# Altium PCB 2015_ALIM_HITEC.PcbDoc
Units mil, origin at the board's own origin, x right, y up, seen from the top; angles counter-clockwise.
Board outline 2440.94 x 1093 mil, 4 copper layers (1-TOP, 2-SIGNAL, 3-GND, 4-BOT), stack 68 mil thick; 13 components, 4 nets, 26 pads, 45 vias.
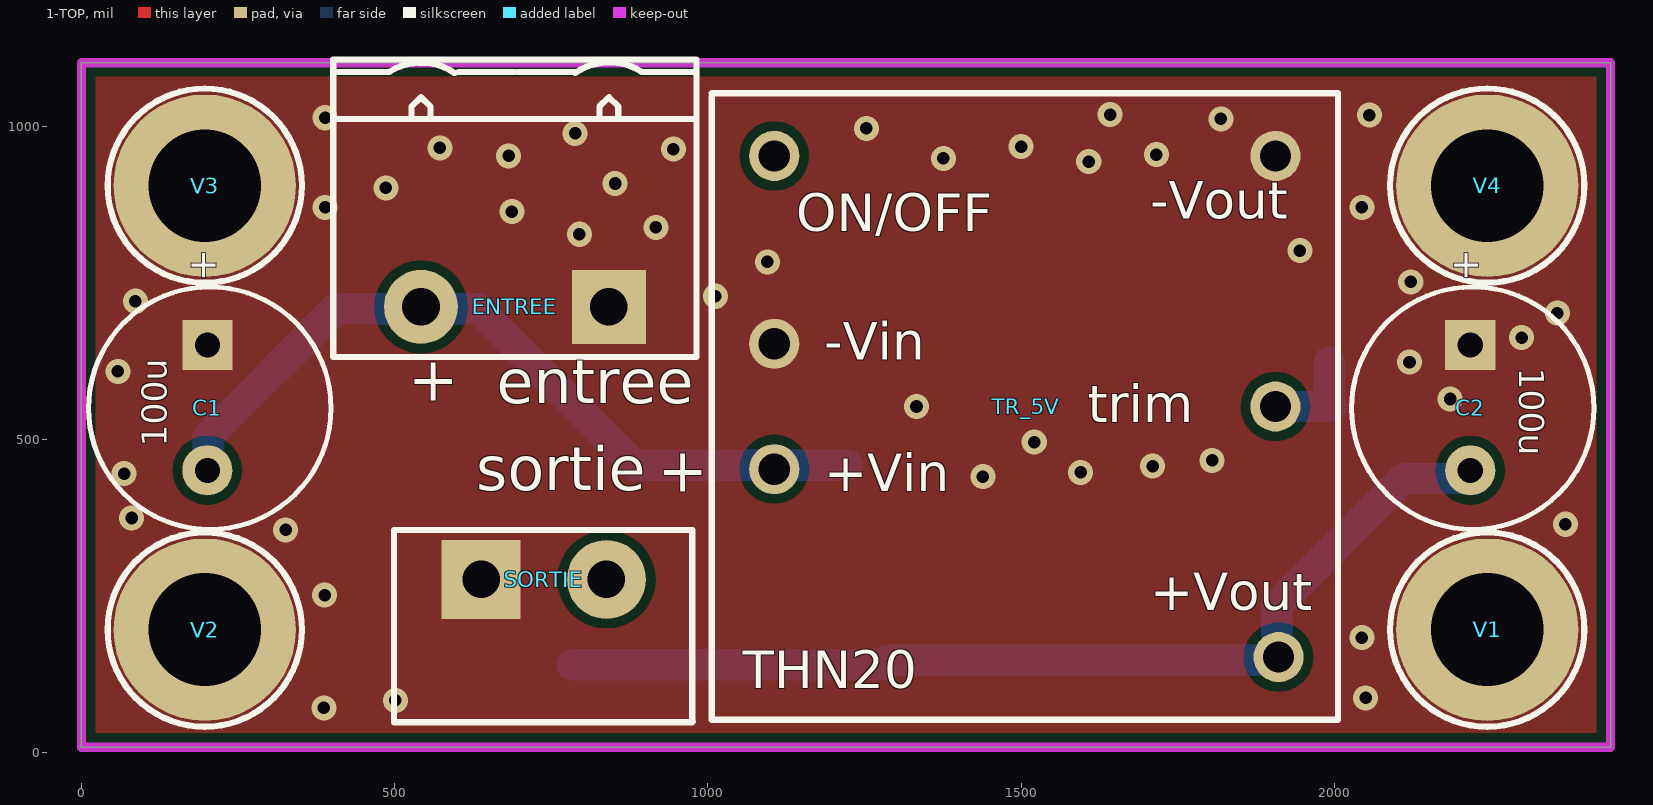
[diagram p0: 1-TOP view]
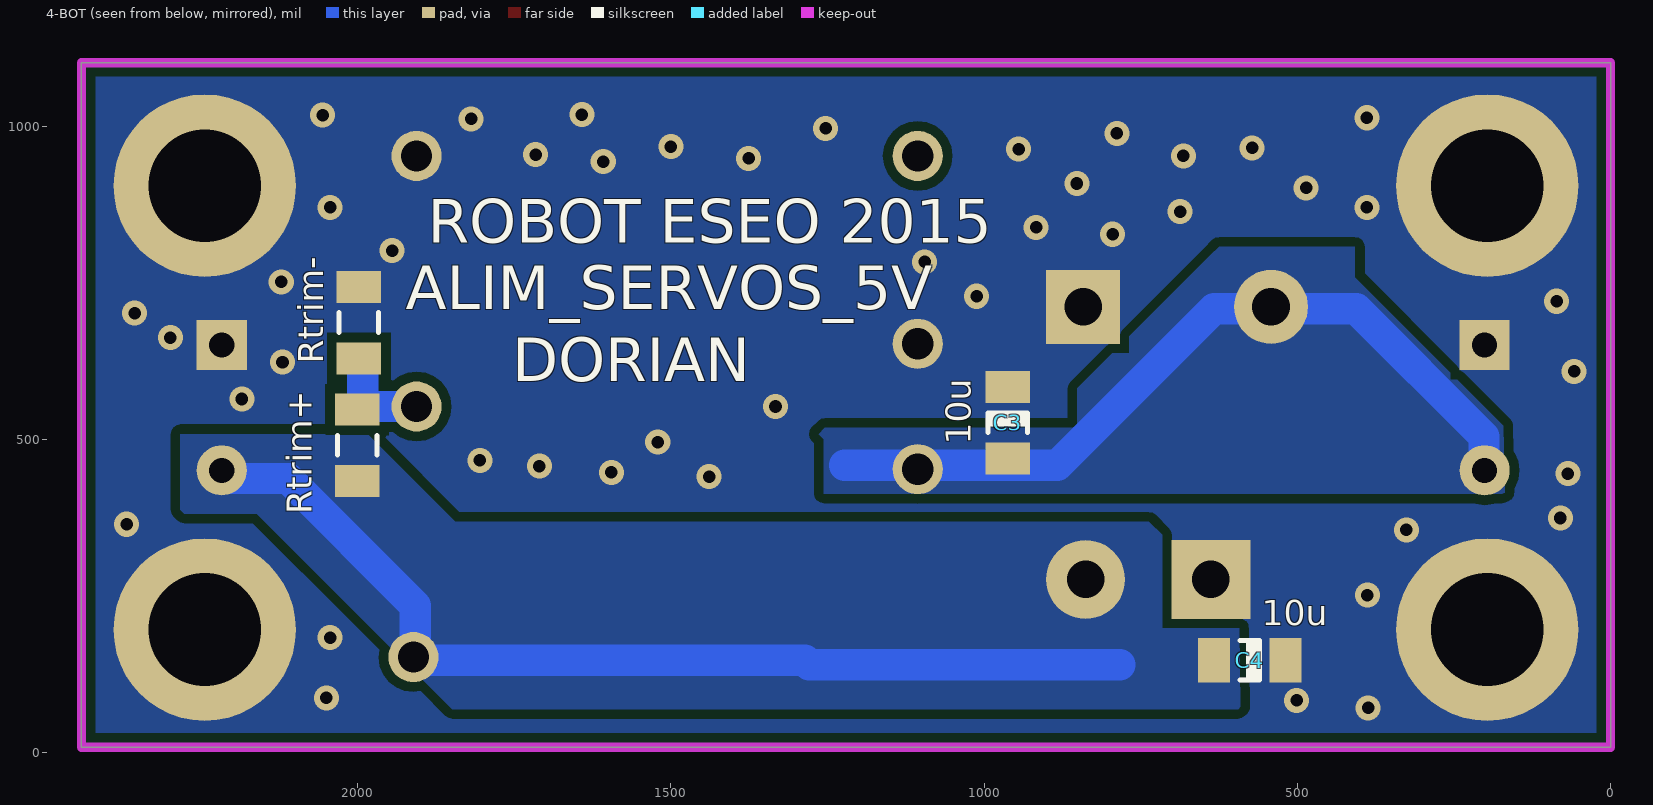
[diagram p1: 4-BOT view, seen from below]
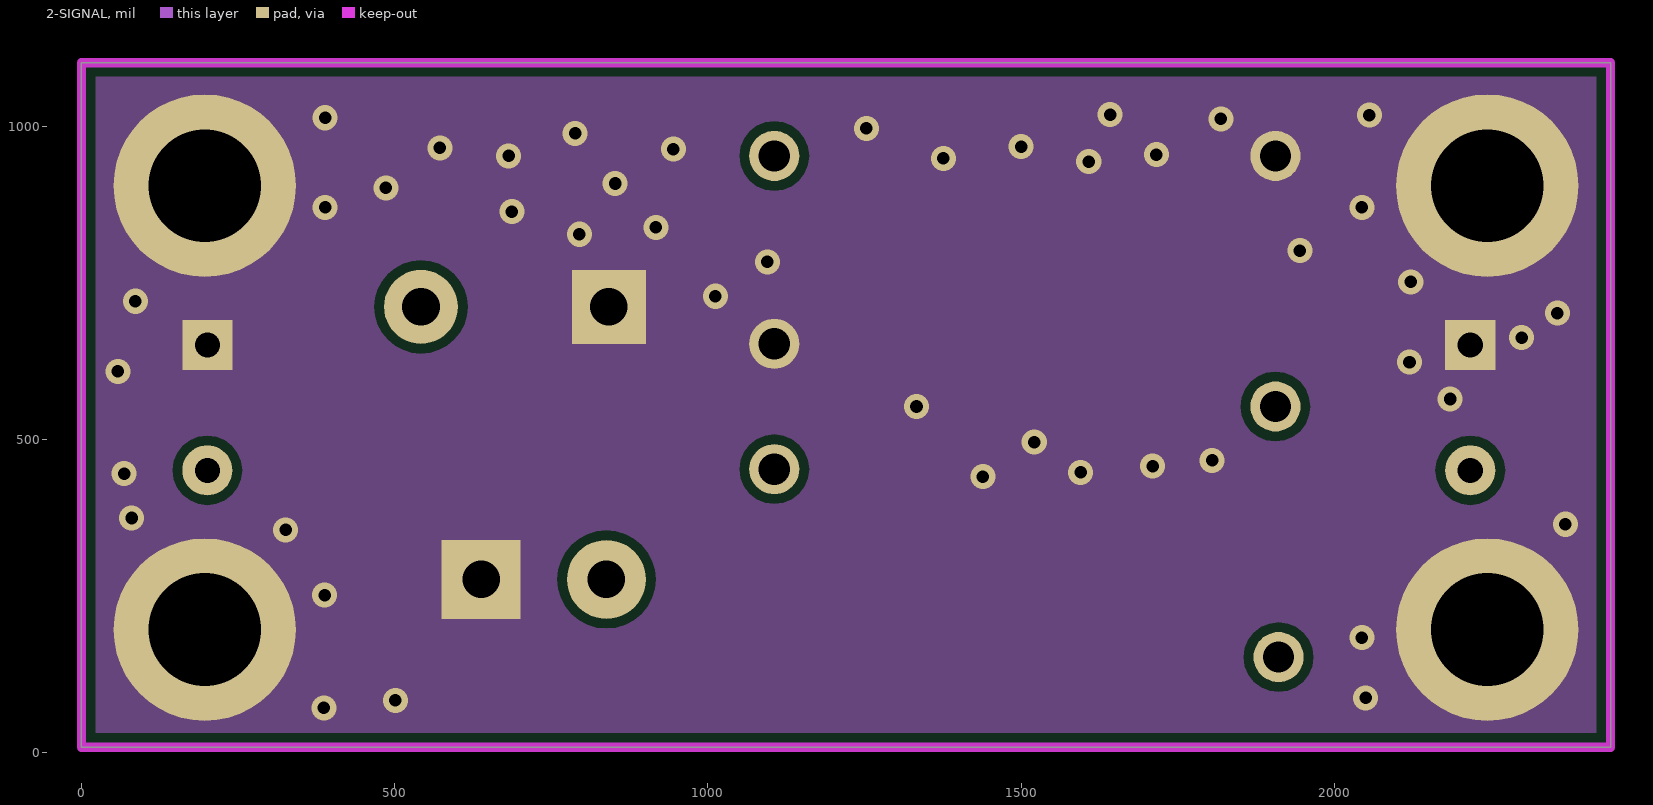
[diagram p2: 2-SIGNAL]
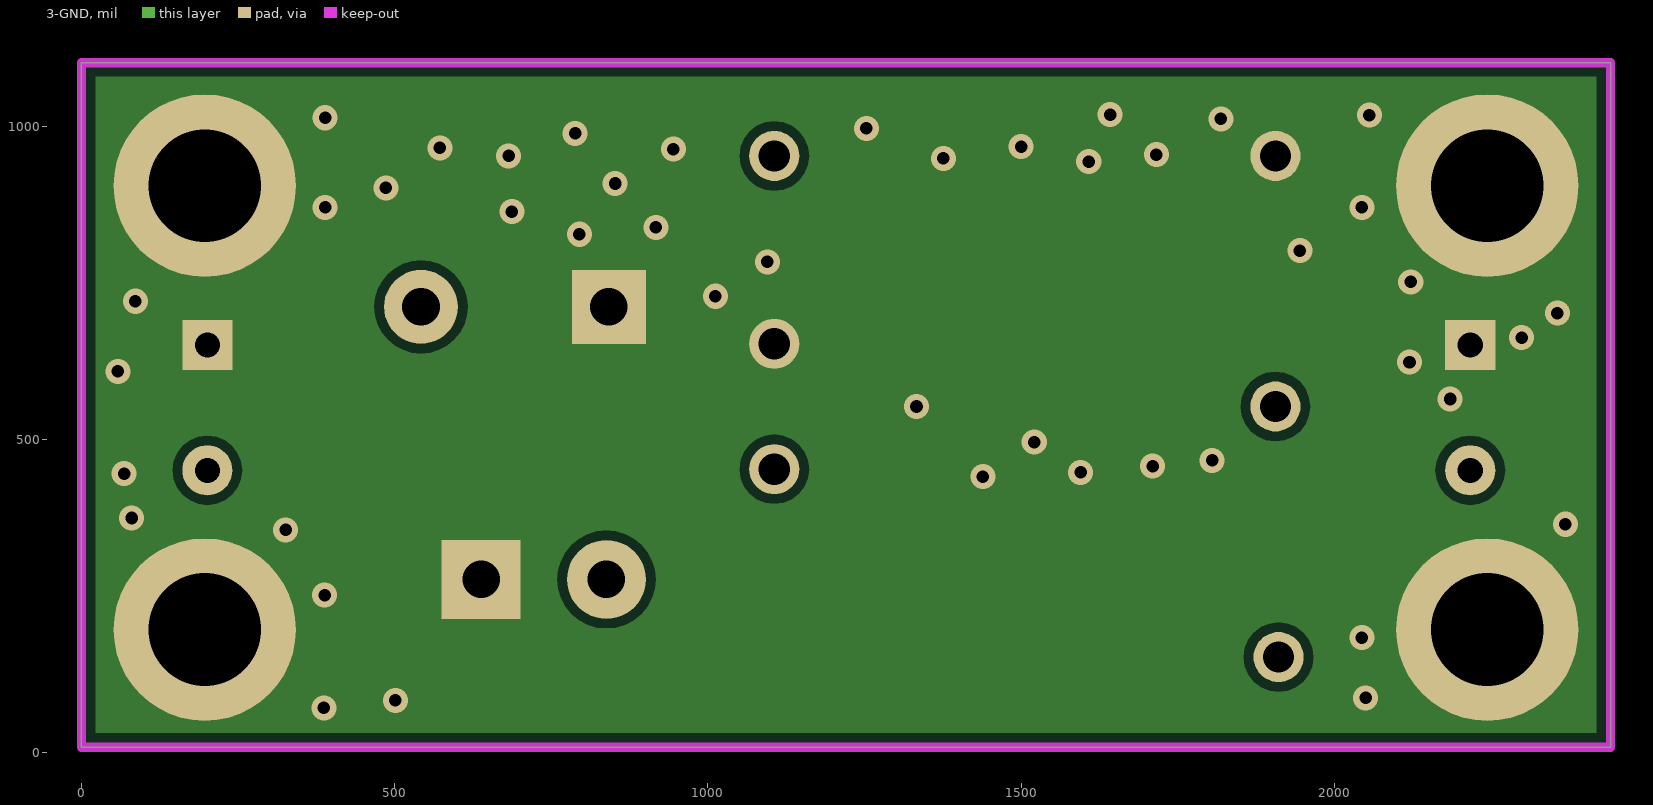
[diagram p3: 3-GND]
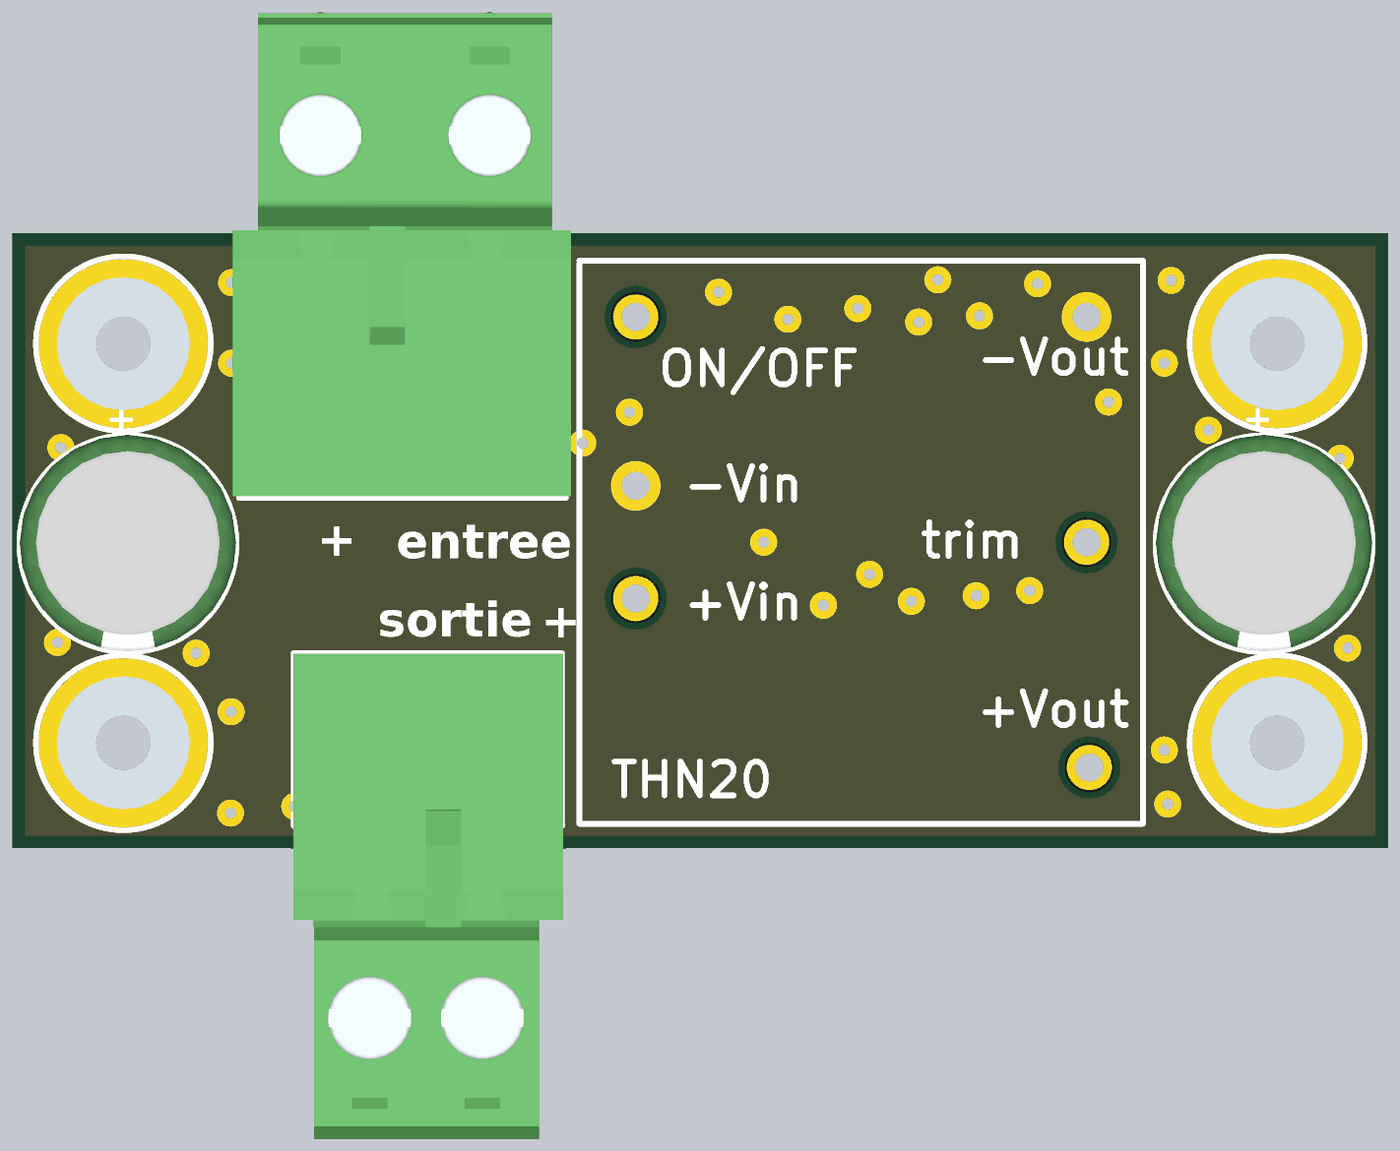
[diagram p4: 3D render of the assembled board from above, using the file's embedded part models]
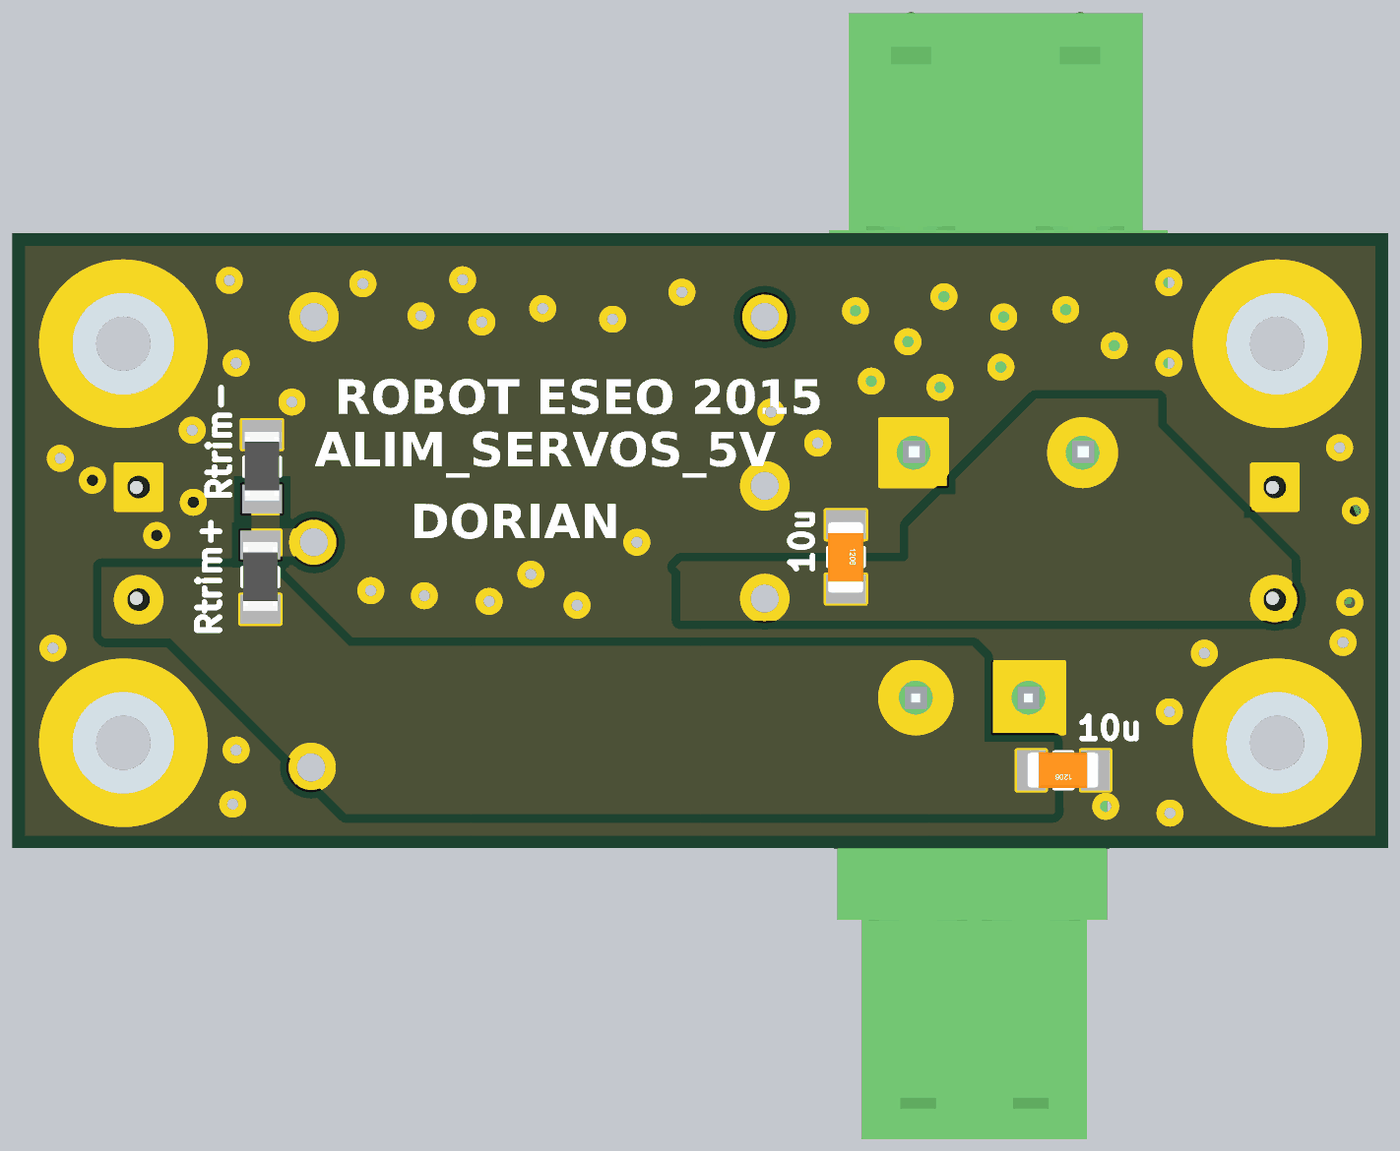
[diagram p5: 3D render of the assembled board from below, using the file's embedded part models]

## Layer stack, top to bottom
Top Solder: solder mask 0.4, Solder Resist, Dk 3.5
1-TOP: signal copper 1.4
Dielectric1: core 20.8, FR-4, Dk 4.8
2-SIGNAL: signal copper 1.4
Dielectric2: prepreg 20.8, FR-4, Dk 4.8
3-GND: signal copper 1.4
Dielectric3: core 20.8, FR-4, Dk 4.8
4-BOT: signal copper 1.4
Bottom Solder: solder mask 0.4, Solder Resist, Dk 3.5

## Board outline
0,9 2440.94,9 2440.94,1102 0,1102

## Design rules (kind name [scope] priority, off if disabled: settings)
Clearance Clearance_4 [InNamedPolygon('GND_TOP') Or  InNamedPolygon('3-GND') Or  InNamedPolygon('2-GND') Or  InNamedPolygon('4-GND')] p1: gap=15
Clearance Clearance_3 [InNamedPolygon('4-GND') Or  InNamedPolygon('GND_TOP') Or  InNamedPolygon('2-GND') Or  InNamedPolygon('3-GND')] p2: gap=10
Clearance Clearance_2 [InNamedPolygon('4-GND') Or  InNamedPolygon('2-GND') Or  InNamedPolygon('3-GND') Or  InNamedPolygon('1-GND') Or  InNamedPolygon('2-GND24')] p3: gap=10
Clearance Clearance_1 [InNamedPolygon('2-GND') Or  InNamedPolygon('3-GND') Or  InNamedPolygon('1-GND') Or  InNamedPolygon('4-GND')] p4: gap=10
Clearance [All] p5: gap=15
FabricationTestpoint [(IsPad And (OnTopLayer Or OnBottomLayer))] p1: side=3 testpointundercomponent=TRUE minsize=40 maxsize=100 preferedsize=60 minholesize=0 maxholesize=40 preferedholesize=32 testpointgrid=1 allowsidetop=TRUE allowsidebottom=TRUE usegrid=TRUE gridtolerance=0.01
HoleSize [All] p1: absolutevalues=TRUE maxlimit=200 minlimit=1 maxpercent=80.000 minpercent=20.000
PlaneConnect [All] p1: planeconnectstyle=Direct reliefexpansion=20 reliefentries=4 reliefconductorwidth=10 reliefairgap=10
PolygonConnect [All] p1: connectstyle=Direct reliefconductorwidth=10 reliefentries=4 polygonreliefangle="90 Angle" airgapwidth=10
RoomDefinition 2015_ALIM_HITEC [InComponentClass('2015_ALIM_HITEC')] p1: confinementstyle=ConfineIn formatcopy=TRUE lockcomponents=FALSE outline 2565,55 6247,55 6247,663 2565,663
RoutingVias [All] p1: holewidth=28 width=50 viastyle="Through Hole" minholewidth=28 minwidth=50 maxholewidth=28 maxwidth=50
SilkToSolderMaskClearance SilkscreenOverComponentPads [IsPad] p1: minsilkscreentomaskgap=10 clearancetoexposedcopper=TRUE
SolderMaskExpansion [All] p1: expansion=4
Width [All] p1: maxlimit=300 minlimit=10 preferedwidth=20
25 further rules are at their usual default settings.

## Components (designator, comment, footprint, x,y, rotation, side; value= is the part's Value field where it differs from the comment)
C1 "100uF" CONDENSATEUR_POLARISE_ELECTROLYTIQUE_RADIAL_5.08/8.9 201,651 r270 top
C2 "100uF" CONDENSATEUR_POLARISE_ELECTROLYTIQUE_RADIAL_5.08/8.9 2217,651 r270 top
C3 "10uF" C1206_N 962,527 r270 bottom
C4 "10uF" C1206_N 576,148 r0 bottom
ENTREE "BORNIER2" BORNIER2_FEM_COUDE 842,712 r180 top
Rtrim+ "-" R1206_N 2001,491 r90 bottom
Rtrim- "-" R1206_N 1998,687 r90 bottom
SORTIE "Bornier 2-Pin" BORNIER2_HORIZ 838,277 r180 top
TR_5V "TRACO THN 20-4811Wi" TRACO_THN20 1006,1053 r0 top
V1 "Entretoise WURTH CMS" ENTRETOISE_CMS 2244.09,196.85 r0 top
V2 "Entretoise WURTH CMS" ENTRETOISE_CMS 196.85,196.85 r0 top
V3 "Entretoise WURTH CMS" ENTRETOISE_CMS 196.85,905.51 r0 top
V4 "Entretoise WURTH CMS" ENTRETOISE_CMS 2244.09,905.51 r0 top

## Footprints (in the part's own frame and the unit in brackets; to place one, negate y for a bottom-side part, rotate by r counter-clockwise, add the part's x,y. Pads: shape width x height; smd on the part's side, far side on the other; paste and mask are expansions set on the pad)
BORNIER2_FEM_COUDE [mm] "Connector; Header; 2 Position; Right Angle; Female; Pin Spacing=5.08mm Green"
  rect 3x3 hole 1.524: 1(0,0)
  round 3 hole 1.524: 2(7.62,0)
  silkscreen extent -3.56,-10.03 11.18,2.03, body extent -3.78,-19.88 11.46,1.96, height 15.2
BORNIER2_HORIZ [mm] "Connector; Header; 2 Position; screw terminal blocks, Pin Spacing=5.08mm"
  rect 3.2x3.2 hole 1.524: 1(5.08,0)
  round 3.2 hole 1.524: 2(0,0)
  silkscreen extent -3.51,-2.01 8.61,5.79, body extent -3.54,-1.99 8.62,19.95, height 15.15
C1206_N [mm] "Chip Capacitor, Body 3.2x1.6mm, IPC Medium Density"
  rect 1.3x1.8 smd: 1(-1.45,0) 2(1.45,0)
  silkscreen extent -0.4,-0.8 0.4,0.8, body extent -1.57,-0.81 1.63,0.79, height 1.02
CONDENSATEUR_POLARISE_ELECTROLYTIQUE_RADIAL_5.08/8.9 [mil] "CONDENSATEUR_POLARISE_ELECTROLYTIQUE_RADIAL ; DIAMETRE : 8.9mm ; ESPACEMENT BROCHES : 5.08mm"
  rect 80x80 hole 40: 1(0,0)
  round 80 hole 40: 2(200,0)
  silkscreen extent -93,-190 294,197, body extent -93,-188 291,196, height 485
ENTRETOISE_CMS [mm] "Entretoise CMS Wurth trou 4.4mm"
  round 7.4 hole 4.572: 1(0,0)
  silkscreen extent -3.94,-3.94 3.94,3.94, body extent -2.99,-3 2.99,2.98, height 3
R1206_N [mm] "Chip Resistor, Body 3.2x1.6mm, IPC Medium Density"
  rect 1.3x1.8 smd: 1(-1.45,0) 2(1.45,0)
  silkscreen extent -0.4,-0.8 0.4,0.8, body extent -1.68,-0.87 1.68,0.87, height 0.71
TRACO_THN20 [mil] "THN20"
  round 80 hole 50: 1(100,-600) 2(100,-400) 3(905,-900) 4(900,-500) 5(900,-100) 6(100,-100)
  silkscreen extent 0,-1000 1000,0, body extent -2,-1001 1001,0, height 390

## Part data
C1 C2: library part "Condensateur Polarise Traversant", "Polarized Capacitor"
C3 C4: library part Capacitor, "Capacitor"
ENTREE: "Terminal blocks, 2 pins, pitch=5mm"
Rtrim+ Rtrim-: library part Resistor, "Resistor"
TR_5V: "Traco 20W 24V to 5V*4A"
V1 V2 V3 V4: "Entretoise Wurth"

## Via types
v1: diameter 40, hole 20, 1-TOP to 4-BOT, 45 vias

## Nets (pads, with @x,y where several pads share a name; then routed paths per layer and width w, separated by ;. In a path a pad name is that pad's centre, name@x,y a point inside that pad or via, vN(x,y) a via of type N, cw(c..) or ccw(c..) an arc to the next point about the centre after c; other vN are vias at no path point)
5V: C2.2 C4.2 Rtrim+.1 SORTIE.2 TR_5V.3 | length 1604
  4-BOT w50: 783,141 1279,141 1286,148 1908,148 1908,235 2111,438 C2.2@2213,438
24V: C1.2 C3.2 ENTREE.2 TR_5V.1 | length 1256.1
  4-BOT w50: C1.2@202,458 202,505 406,709 633,709 883,459 1223,459
GND: C1.1 C2.1 C3.1 C4.1 ENTREE.1 Rtrim-.2 SORTIE.1 TR_5V.2 TR_5V.5 V1.1 V2.1 V3.1 V4.1
  other v1: 387,72 501,84 2050,88 2044,184 388,252 326,356 2369,365 80,375 1439,441 68,446 1595,448 1710,458 1805,467 1521,496 1333,553 2185,565 58,609 2120,624 2299,663 2356,702 86,721 1012,729 2122,752 1095,784 1945,802 795,828 917,839 687,864 389,871 2044,871 486,902 852,909 1608,944 1376,949 682,953 1716,955 945,964 572,966 1500,968 788,989 1253,997 1819,1012 389,1014 2056,1018 1642,1019
NetRtrim+_2: Rtrim+.2 Rtrim-.1 TR_5V.4 | length 161.5
  4-BOT w50: TR_5V.4 1995.15,553 1992,556.15 Rtrim-.1@1992,624
pads on no net: TR_5V.6

## Polygon pours and split planes (outlines as drawn)
24V on 4-BOT "4_24V" (solid, pour order 11): 169,410 173,414 1256,414 1256,501 1264,509 1254,519 851,519 851,582 638,795 625,808 408,808 408,759 171,522
5V on 4-BOT "4_5V" (solid, pour order 12): 593,225 737,369 789,369 1844,369 1979,504 1984,509 2283,509 2283,388 2281,386 2277,382 2162,382 2161,382 1999,220 1849,70 591,70
GND on 4-BOT "1-TOP-No Net" (solid, pour order 23): 0,0 0,1102.36 2440.94,1102.36 2440.94,0
GND on 1-TOP "1-TOP-No Net1" (solid, pour order 10): 0,0 0,1102.36 2440.94,1102.36 2440.94,0
GND on 3-GND "1-TOP-No Net2" (solid, pour order 17): 0,0 0,1102.36 2440.94,1102.36 2440.94,0
GND on 2-SIGNAL "1-TOP-No Net3" (solid, pour order 20): 0,0 0,1102.36 2440.94,1102.36 2440.94,0

## Keep-outs
Keep-Out Layer:
  the board outline again, w15

## Silkscreen, mask and mechanical layers (free items; w line width, h text height)
Top Overlay:
  text "100u" at 2295,615 h40 r270
  text "+" at 522,539 h120
  text "entree" at 663,535 h120
  text "100u" at 136,489 h40 r90
  text "sortie" at 630,396 h120
  text "+" at 920,394 h120
Bottom Overlay:
  text "ROBOT ESEO 2015" at 1888,791 h120
  text "ALIM_SERVOS_5V" at 1923,685 h120
  text "DORIAN" at 1753,570 h120
  text "10u" at 1021,492 h40 r270
  text "10u" at 557,204 h40

## Dimensions
2440.94,1102 to 2440.94,9 on Mechanical 15
2440.94,9 to 0,1102 on Mechanical 15

## Text inside footprints (layer, text, board x,y; h text height)
C1: Top Overlay "+" at 175.8,803.76 h45 r270
C2: Top Overlay "+" at 2191.8,803.76 h45 r270
TR_5V: Top Overlay "+Vout" at 1706,228 h60; Top Overlay "-Vout" at 1706,853 h60; Top Overlay "+Vin" at 1186,418 h60; Top Overlay "-Vin" at 1186,628 h60; Top Overlay "THN20" at 1056,103 h60; Top Overlay "ON/OFF" at 1141,833 h60; Top Overlay "trim" at 1606,528 h60